# EAGLE board Joystick (EAGLE 6.3)
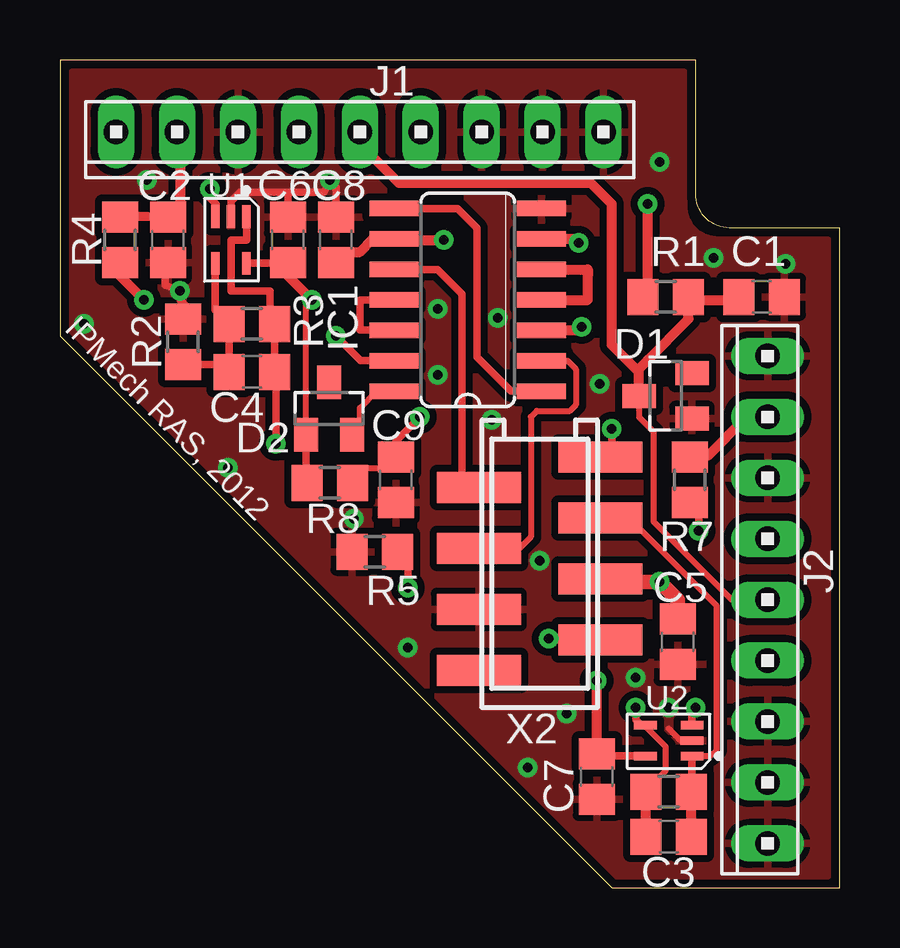
[diagram p0: board, top side]
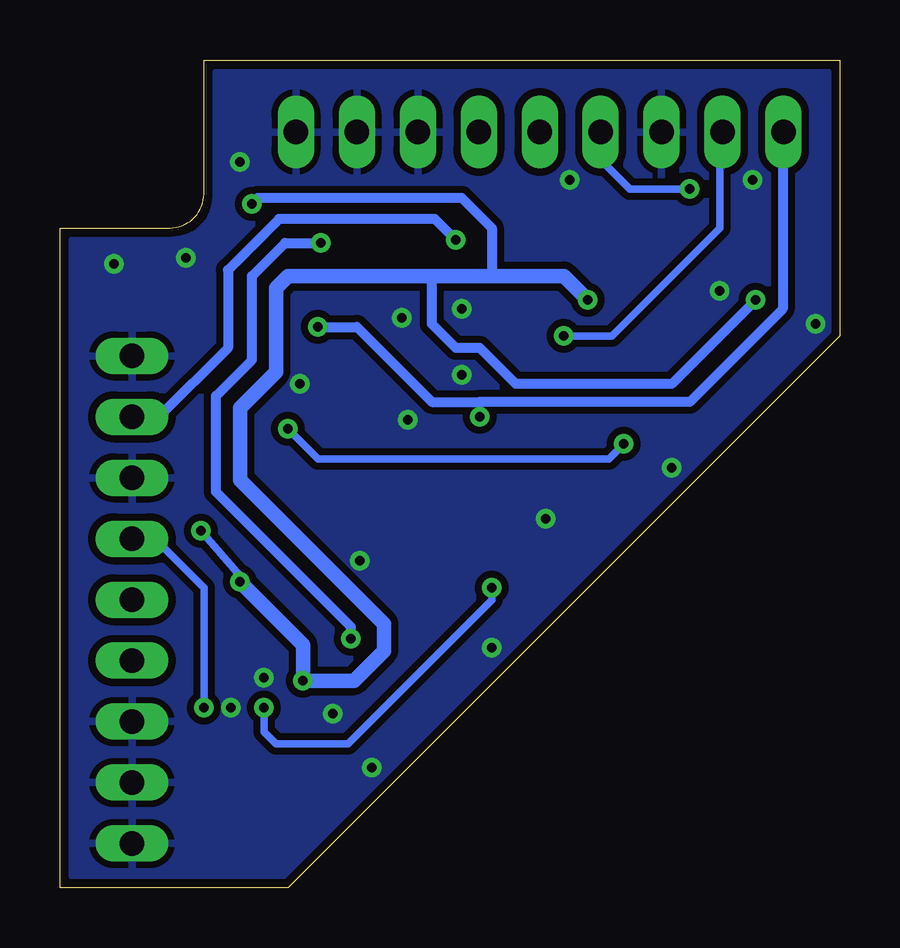
[diagram p1: board, bottom side, seen from below]

Size 32.5 x 34.5 mm. Coordinates in mm from the lower left corner, seen from the top.
Outline: 23,0 32.5,0 32.5,27.5 27.91,27.5 arc-90 26.5,28.91 26.5,34.5 0,34.5 0,23 23,0
Copper layers (1*16): Top 0.035mm / dielectric 1.5mm / Bottom 0.035mm
Design rules "default *": minimum track width 0.2mm, minimum drill 0.4mm, track to track 0.3mm, track to pad 0.2mm, pad to pad 0.2mm, via to via 0.2mm, smd to smd 0mil, copper to edge 0.35mm, drill to drill 0.2mm, minimum pad ring 10mil, minimum via ring 0.2mm, stop-mask expansion 0.01mm, vias tented up to drill 0.5mm, thermal gap 10mil

## Footprints (pad centres in the part's own frame; a part is rotated, then mirrored left to right if it is on the bottom)
C0805 = smd 1.3 x 1.5: 1 -0.95,0; 2 0.95,0
SOT23 = smd 1 x 1.4: 1 -0.95,-1.1; 2 0.95,-1.1; 3 0,1.1
SO14 = smd 0.66 x 2.032: 1 -3.81,-3.073; 2 -2.54,-3.073; 3 -1.27,-3.073; 4 0,-3.073; 5 1.27,-3.073; 6 2.54,-3.073; 7 3.81,-3.073; 8 3.81,3.073; 9 2.54,3.073; 10 1.27,3.073; 11 0,3.073; 12 -1.27,3.073; 13 -2.54,3.073; 14 -3.81,3.073
10X09MTA = drill 1.016 long: 1 10.16,0; 2 7.62,0; 3 5.08,0; 4 2.54,0; 5 0,0; 6 -2.54,0; 7 -5.08,0; 8 -7.62,0; 9 -10.16,0
R0805 = smd 1.3 x 1.5: 1 -0.95,0; 2 0.95,0
SC70(KS-5) = smd 0.36 x 0.95: 1 -0.65,-0.975; 2 0,-0.97; 3 0.65,-0.975; 4 0.65,0.975; 5 -0.65,0.975
MMT-F-SMD-8 = smd 1.3 x 3.5: 1 4.445,-2.54; 2 3.175,2.54; 3 1.905,-2.54; 4 0.635,2.54; 5 -0.635,-2.54; 6 -1.905,2.54; 7 -3.175,-2.54; 8 -4.445,2.54

## Placement (x,y rotation side)
C1  1uF  [C0805]  29.25,24.62 0 top
C2  1uF  [C0805]  4.5,27 270 top
C3  0.1uF  [C0805]  25.38,2.12 0 top
C4  0.1uF  [C0805]  8,21.5 0 top
C5  10uF  [C0805]  25.75,10.25 270 top
C6  0.1uF  [C0805]  9.5,27 90 top
C7  0.1uF  [C0805]  22.38,4.62 270 top
C8  1uF  [C0805]  11.5,27 90 top
C9  1uF  [C0805]  14,17 270 top
D1  BZX84-C4V7  [SOT23]  25.25,20.5 90 top
D2  BAV199  [SOT23]  11.22,19.97 0 top
IC1  74HC14D  [SO14]  17,24.5 90 top
J1  [10X09MTA]  12.5,31.5 180 top
J2  [10X09MTA]  29.5,12 90 top
R1  100R 5%  [R0805]  25.25,24.62 0 top
R2  2K5 1%  [R0805]  5.12,22.75 270 top
R3  1K6 1%  [R0805]  8,23.5 0 top
R4  1K 5%  [R0805]  2.5,27 270 top
R5  2K5 1%  [R0805]  13.12,14 0 top
R6  1K6 1%  [R0805]  25.38,4 0 top
R7  1K 5%  [R0805]  26.25,17 270 top
R8  1K 5%  [R0805]  11.25,16.88 180 top
U1  AD8627AKS  [SC70(KS-5)]  7.12,27 180 top
U2  AD8627AKS  [SC70(KS-5)]  25.38,6.12 90 top
X2  7-188275-8  [MMT-F-SMD-8]  20,13.5 90 top

## Library data of the parts
C1-C9 R1-R8 = rcl
D1 D2 = diode
IC1 = 74xx-eu
J1 J2 = con-amp
U1 U2 = my_components
X2 = con-amp-micromatch

## Nets
+4V7: C1.1 D1.3 J1.5 J2.5 R1.2
+5V: C5.1 C6.1 C7.1 D2.1 R1.1 R4.2 R7.2 R8.2 U1.5 U2.5 X2.5
GNDA: C1.2 C2.2 C5.2 C6.2 C7.2 C8.2 C9.2 D1.1 IC1.7 J1.3 J1.7 J1.8 J1.9 J2.1 J2.3 J2.7 J2.8 J2.9 R2.1 R5.1 U1.2 U2.2 X2.6
N$1: J2.4 U2.3
N$2: C3.1 R5.2 R6.1 U2.4
N$3: C3.2 R6.2 U2.1 X2.3
N$4: IC1.4 IC1.5
N$5: IC1.10 X2.2
N$6: D2.2 IC1.14
N$7: IC1.11 IC1.12
N$8: IC1.1 IC1.8
N$9: C2.1 IC1.13 J1.2 R4.1
N$10: IC1.2 X2.4
N$11: C8.1 IC1.9 J2.2 R7.1
N$12: C9.1 IC1.3 J1.1 R8.1
N$19: J1.4 U1.3
N$27: C4.1 R2.2 R3.1 U1.4
N$37: C4.2 R3.2 U1.1 X2.1
TOTMANN_TASTE: IC1.6 X2.7

## Tracks (layer width: path | path; a pad name or v marks a point on that pad's centre or on a via)
+4V7
  Top 0.254: D1.3 24.15,19.6 24.75,19 24.75,15.25 28,12 J2.5
  Top 0.406: J1.5 12.5,31 14.12,29.38 22.12,29.38 23,28.5 23,22.62 24.12,21.5 | D1.3 24.12,20.85 24.12,21.5 | C1.1 28.3,24.8 28,24.5 26.57,24.5 R1.2 26.2,23.7 24.5,22 24.12,21.62 24.12,21.5
+5V  (via drill 0.4)
  Top 0.254: X2.5 22.66,12.75 | R7.2 26.62,15.68 | D2.1 10.25,18.89 10.25,24.25 v10.5,24.5
  Top 0.305: U2.5 24.38,5.5 22.38,5.5 22.3,5.58 C7.1 | C6.1 9.5,25.5 9.38,26.05 | U1.5 9.97,26.02 | 26.62,15.68 v26.62,14.88 | 10,18.5 10,18.6 D2.1 10.27,16.91 R8.2 | R1.1 24.5,24.32
  Top 0.406: C7.1 v22.38,8.62 | 9.5,25.5 v10.5,24.5 | 9.97,26.02 9.38,26.05 | 24.5,24.32 v24.5,28.5 | R4.2 2.5,25.5 v3.5,24.5
  Top 0.61: 22.66,12.75 v25,12.75 25.75,12 C5.1
  Bottom 0.305: v26.62,14.88 25,13 v25,12.75
  Bottom 0.406: v24.5,28.5 24.25,28.75 15.75,28.75 14.5,27.5 14.5,25.5 | v3.5,24.5 7,21 13.5,21 15,22.5 16,22.5 17,23.5 17,25.5
  Bottom 0.61: v25,12.75 22.38,10.12 v22.38,8.62 20.25,8.62 19,9.88 19,11 25,17 25,20 23.5,21.5 23.5,25 23,25.5 17,25.5 14.5,25.5 11.5,25.5 v10.5,24.5
GNDA  (via drill 0.4)
  Top 0.254: U2.2 25.88,6.12 25.38,6.62
  Top 0.305: R2.1 5.25,24.25 5,24.5 | C2.2 4.38,25.62 4.38,25.12 v5,24.88 | C6.2 9.5,29 | 9.5,29 7.5,29 7.12,28.62 U1.2 | C8.2 11.5,29.2 v11.25,29.5 11,29 9.5,29
  Top 0.406: J2.3 29.5,17
  other vias: 19.5,5 7,17.5 15.75,21.38 1,23.5 18,19.5 14.5,10 30.25,26 25,30.25 12.25,15.38 27.25,26.25 18.25,23.75 24,8.75 15.75,24.12 3.62,29.5 25.38,7.5 21.12,7.25 22.5,21 20,13.62
  pour Top (isolate 0.3): 0.5,34 26,34 26,28.41 arc90 27.41,27 32,27 32,0.5 23,0.5 0.5,23
  pour Bottom (isolate 0.3): 0.5,34 0.5,23 23,0.5 32,0.5 32,27 27.8,27 arc-90 26,28.8 26,34
N$1  (via drill 0.4)
  Top 0.305: U2.3 26.35,7.35 v26.5,7.5
  Bottom 0.305: v26.5,7.5 26.5,12.5 28.54,14.54 J2.4
N$2  (via drill 0.4)
  Top 0.254: R6.1 24.43,4.05 25.25,4.88 25.25,5.88 24.4,6.72 U2.4
  Top 0.305: U2.4 24.23,6.78 24,7 v24,7.5 | v14.5,12.5 14.5,13.5 R5.2
  Top 0.406: C3.1 R6.1
  Bottom 0.305: v24,7.5 24,6.5 23.5,6 20.5,6 14.5,12 v14.5,12.5
N$3
  Top 0.254: 24,15 22.95,15 X2.3 22.54,15.34 22.12,15.12 24,15.12 27.38,11.75 27.38,5.75 27.1,5.47 U2.1
  Top 0.305: 26.35,4.15 U2.1
  Top 0.406: C3.2 R6.2 26.35,4.15
N$4
  Top 0.406: IC1.4 22,24.5 22,25.5 22,25.77 IC1.5
N$5
  Top 0.305: IC1.10 15.73,25.77 16.75,24.75 16.75,16.39 X2.2
N$6
  Top 0.254: D2.2 12.5,19.2 12.5,20 13.19,20.69 IC1.14
N$7
  Top 0.305: IC1.11 12.5,24.5 12.5,23.23 IC1.12
N$8
  Top 0.305: IC1.1 18.81,20.69 17.38,22.12 17.38,27.5 16.57,28.31 IC1.8
N$9  (via drill 0.4)
  Top 0.305: 2.38,28.07 5,27.95 C2.1 R4.1 2.38,27.83 | IC1.13 12.54,21.96 v11.5,23
  Top 0.406: J1.2 5,31.38 5,27.95
  Bottom 0.305: J1.2 5,31.38 5,27.5 9.5,23 v11.5,23
N$10
  Top 0.254: IC1.2 21.16,21.96 21.5,21.62 21.5,20.12 21.25,19.88 19.88,19.88 19.62,19.62 19.62,14.62 19,14 18.82,14 X2.4
N$11  (via drill 0.4)
  Top 0.406: C8.1 11.95,26.5 12.5,26.5 13.04,27.04 IC1.9 13.97,27 v16,27 | R7.1 26.3,18 27,18 28.62,19.62 J2.2
  Bottom 0.406: v16,27 16.88,27.88 23.38,27.88 25.5,25.75 25.5,22.5 28.38,19.62 J2.2
N$12  (via drill 0.4)
  Top 0.254: R8.1 12.57,17.5 13.5,17.5 13.95,17.95 C9.1
  Top 0.305: C9.1 14,18.62 v15,19.62
  Top 0.406: IC1.3 20.09,23.25 21.62,23.25 v21.75,23.38
  Bottom 0.305: v15,19.62 15,20.25
  Bottom 0.406: J1.1 2.38,31.46 2.38,24.12 6.25,20.25 15,20.25 17,20.25 20.12,23.38 v21.75,23.38
N$19  (via drill 0.4)
  Top 0.305: U1.3 6.5,28 6.5,28.5 6.25,28.75 v6.25,29.12
  Bottom 0.305: v6.25,29.12 8.75,29.12 9.96,30.34 J1.4
N$27
  Top 0.305: R2.2 6.75,21.8 C4.1 R3.1 6.47,24.07 U1.4
N$37  (via drill 0.4)
  Top 0.305: U1.1 7.78,27 7.12,27 7.12,24.88 8.75,24.88 8.75,23.5 R3.2 C4.2 | 9,21.95 v9,18.5 | v23,19.12 23,17.98 X2.1
  Top 0.406: 9,21.95 C4.2
  Bottom 0.305: v23,19.12 21.75,17.88 9.62,17.88 v9,18.5
TOTMANN_TASTE  (via drill 0.4)
  Top 0.406: X2.7 22.21,10 22.25,10 22.25,10.38 v20.38,10.38 | v21.62,26.88 21.46,27.04 IC1.6
  Bottom 0.406: v20.38,10.38 20.38,10.88 26,16.5 26,20.5 24.5,22 24.5,25.5 23.12,26.88 v21.62,26.88

## Text on the board
tPlace: IPMech RAS, 2012
Reference: Внимание: контакты джойстиков / запаиваются вручную. Волновая / пайка не допускается.
Reference2: Джойстик вставляется с этой / стороны в соответствующие / отверстия в плате.